# Altium PCB 电眼主板.PcbDoc (part 1 of 3)
Units mm, origin at the board's own origin, x right, y up, seen from the top; angles counter-clockwise.
Board outline 180 x 100 mm, 2 copper layers (Top Layer, Bottom Layer); 220 components, 270 nets, 826 pads, 211 vias.
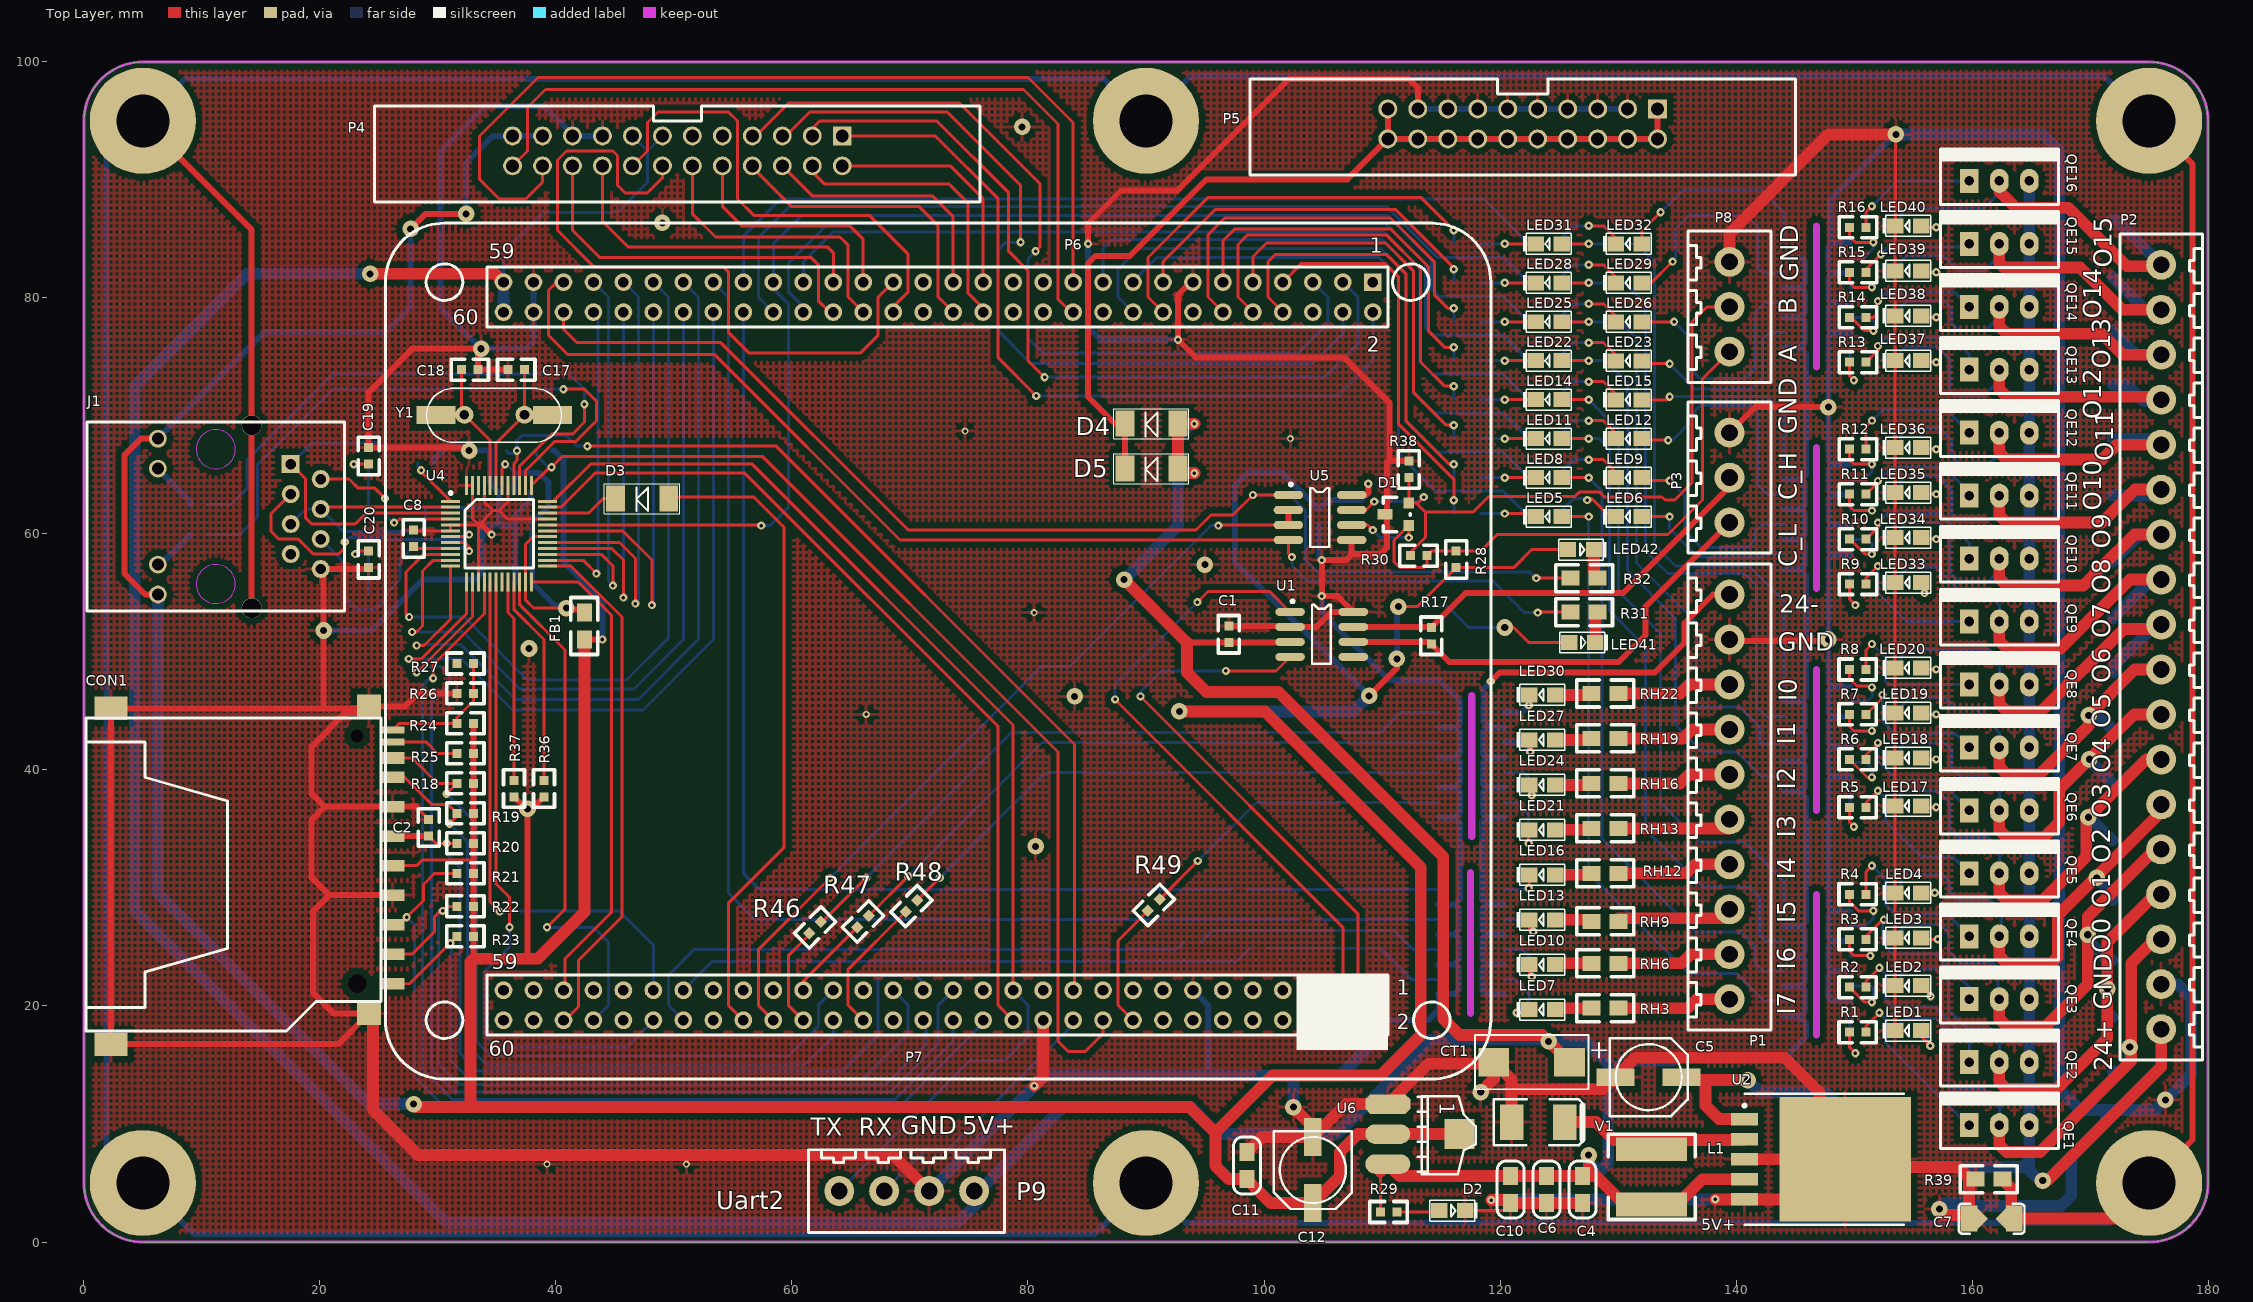
[diagram p0: Top Layer view]
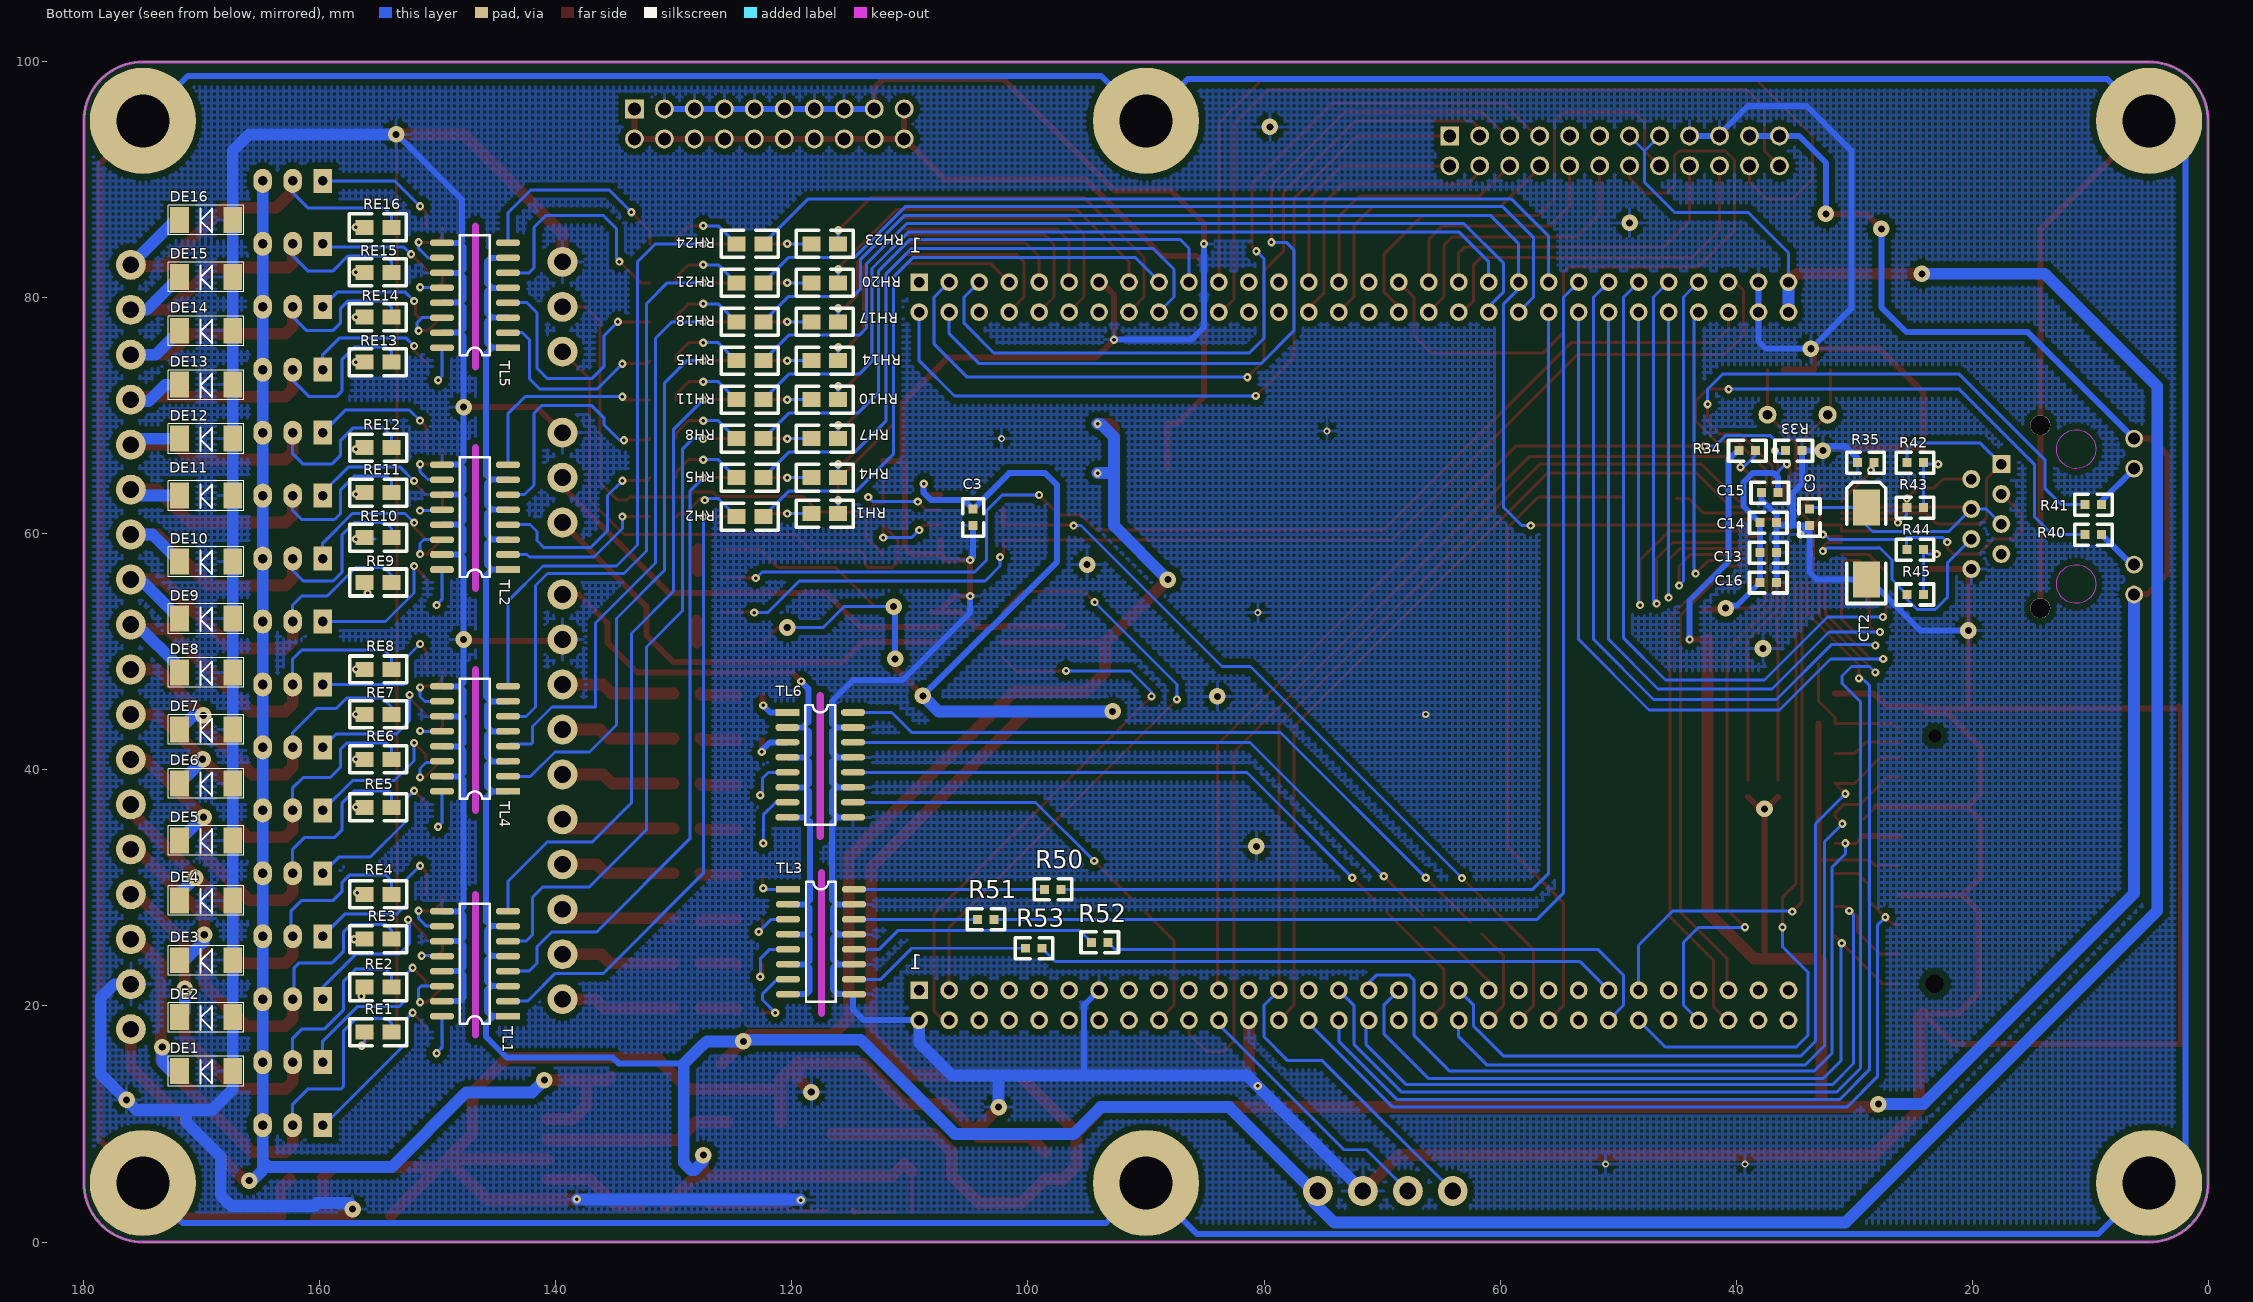
[diagram p1: Bottom Layer view, seen from below]

## Layer stack, top to bottom
Top Layer: signal copper 0.0356
Dielectric: dielectric 0.32, FR-4, Dk 4.8
Bottom Layer: signal copper 0.0356

## Board outline
0,5 ccw(c5,5) 5,0 175,0 ccw(c175,5) 180,5 180,95 ccw(c175,95) 175,100 5,100 ccw(c5,95) 0,95

## Design rules (kind name [scope] priority, off if disabled: settings)
Clearance Clearance_1 [Inpolygon] p1: gap=0.508
Clearance [All] p2: gap=0.229
HoleSize [All] p1: absolutevalues=TRUE maxlimit=5 minlimit=0.025 maxpercent=80.000 minpercent=20.000
MinimumSolderMaskSliver [All] p1: minsoldermaskwidth=0
PolygonConnect [All] p1: connectstyle=Relief reliefconductorwidth=0.254 reliefentries=4 polygonreliefangle="90 Angle"
RoutingVias [All] p1: holewidth=0.6 width=1.4 viastyle="Through Hole" minholewidth=0.3 minwidth=0.7 maxholewidth=1 maxwidth=2
SilkToSilkClearance [All] p1: silktosilkclearance=0.01
SilkscreenOverComponentPads [All] p1: minsilkscreentomaskgap=0
SolderMaskExpansion [All] p1: expansion=0.102
TestPointUsage [All] p1: valid=0 allowmultiple=FALSE
Testpoint [All] p1: side=3 testpointundercomponent=TRUE minsize=1.016 maxsize=2.54 preferedsize=1.524 minholesize=0 maxholesize=1.016 preferedholesize=0.813 testpointgrid=0.025 style=297 order=0-112345678
Width [All] p1: maxlimit=1 minlimit=0.254 preferedwidth=0.254
20 further rules are at their usual default settings.

## Components (designator, comment, footprint, x,y, rotation, side; value= is the part's Value field where it differs from the comment)
C1 "电容(贴片)" 0603 97.028,50.8 r90 top
C2 "电容(贴片)" 0603 29.21,35.814 r270 top
C3 "电容(贴片)" 0603 104.648,60.706 r90 bottom
C4 "电容(贴片)" 0805C 127,3.302 r90 top
C5 "电解电容(贴片)" CC6.56.5 132.588,13.97 r180 top
C6 "10uF" 0805C 123.952,5.588 r270 top
C7 "102/2KV" 0805CC 163.322,2.032 r180 top
C8 "电容(贴片)" 0603 27.94,58.928 r90 top
C9 "电容(贴片)" 0603 33.782,60.706 r90 bottom
C10 "电容(贴片)" 0805C 120.904,3.302 r90 top
C11 "电容(贴片)" 0805C 98.552,7.62 r270 top
C12 "电解电容(贴片)" CC6.56.5 104.14,6.096 r90 top
C13 "电容(贴片)" 0603 36.576,58.42 r0 bottom
C14 "电容(贴片)" 0603 36.576,60.96 r0 bottom
C15 "电容(贴片)" 0603 37.846,63.5 r180 bottom
C16 "电容(贴片)" 0603 36.576,55.88 r0 bottom
C17 "电容(贴片)" 0603 37.338,73.914 r180 top
C18 "电容(贴片)" 0603 32.004,73.914 r0 top
C19 "电容(贴片)" 0603 24.13,67.31 r270 top
C20 "电容(贴片)" 0603 24.13,57.15 r90 top
CON1 "SD卡座" SDCARD 26.162,24.384 r180 top
CT1 "钽电容" CT7343 122.682,15.24 r180 top
CT2 "钽电容" 6032 28.956,62.23 r90 bottom
D1 "PSM712" SOT-23 112.268,60.706 r90 top
D2 "二极管(贴片发光红色)" LED-0805 114.808,2.54 r0 top
D3 "二极管(贴片)" D1206 49.558,62.992 r180 top
D4 "二极管(贴片)" D1206 92.71,69.342 r180 top
D5 "二极管(贴片)" D1206 92.71,65.532 r180 top
DE1 "二极管(贴片)" D1206 167.386,14.478 r0 bottom
DE2 "二极管(贴片)" D1206 167.386,19.05 r0 bottom
DE3 "二极管(贴片)" D1206 167.386,23.876 r0 bottom
DE4 "二极管(贴片)" D1206 167.386,28.956 r0 bottom
DE5 "二极管(贴片)" D1206 167.386,34.036 r0 bottom
DE6 "二极管(贴片)" D1206 167.386,38.862 r0 bottom
DE7 "二极管(贴片)" D1206 167.386,43.434 r0 bottom
DE8 "二极管(贴片)" D1206 167.386,48.26 r0 bottom
DE9 "二极管(贴片)" D1206 167.386,52.832 r0 bottom
DE10 "二极管(贴片)" D1206 167.386,57.658 r0 bottom
DE11 "二极管(贴片)" D1206 167.386,63.246 r0 bottom
DE12 "二极管(贴片)" D1206 167.386,68.072 r0 bottom
DE13 "二极管(贴片)" D1206 167.386,72.644 r0 bottom
DE14 "二极管(贴片)" D1206 167.386,77.216 r0 bottom
DE15 "二极管(贴片)" D1206 167.386,81.788 r0 bottom
DE16 "二极管(贴片)" D1206 167.386,86.614 r0 bottom
FB1 "220R 2A" 0805 42.418,53.34 r270 top
J1 "RJ45" HR911105A 11.176,61.468 r90 top
L1 "电感(贴片)" 6045 132.842,7.874 r270 top
LED1 "二极管(贴片发光红色)" LED-0805 155.702,18.034 r180 top
LED2 "二极管(贴片发光红色)" LED-0805 155.702,21.844 r180 top
LED3 "二极管(贴片发光红色)" LED-0805 155.702,25.908 r180 top
LED4 "二极管(贴片发光红色)" LED-0805 155.702,29.718 r180 top
LED5 "二极管(贴片发光黄色)" LED-0805 125.247,61.595 r180 top
LED6 "二极管(贴片发光黄色)" LED-0805 132.046,61.589 r180 top
LED7 "二极管(贴片发光绿色)" LED-0805 124.714,19.812 r180 top
LED8 "二极管(贴片发光黄色)" LED-0805 125.247,64.897 r180 top
LED9 "二极管(贴片发光黄色)" LED-0805 132.046,64.891 r180 top
LED10 "二极管(贴片发光绿色)" LED-0805 124.714,23.622 r180 top
LED11 "二极管(贴片发光黄色)" LED-0805 125.247,68.199 r180 top
LED12 "二极管(贴片发光黄色)" LED-0805 132.046,68.193 r180 top
LED13 "二极管(贴片发光绿色)" LED-0805 124.714,27.432 r180 top
LED14 "二极管(贴片发光黄色)" LED-0805 125.247,71.501 r180 top
LED15 "二极管(贴片发光黄色)" LED-0805 132.046,71.495 r180 top
LED16 "二极管(贴片发光绿色)" LED-0805 124.714,31.242 r180 top
LED17 "二极管(贴片发光红色)" LED-0805 155.702,37.084 r180 top
LED18 "二极管(贴片发光红色)" LED-0805 155.702,41.148 r180 top
LED19 "二极管(贴片发光红色)" LED-0805 155.702,44.958 r180 top
LED20 "二极管(贴片发光红色)" LED-0805 155.702,48.768 r180 top
LED21 "二极管(贴片发光绿色)" LED-0805 124.714,35.052 r180 top
LED22 "二极管(贴片发光黄色)" LED-0805 125.247,74.803 r180 top
LED23 "二极管(贴片发光黄色)" LED-0805 132.046,74.797 r180 top
LED24 "二极管(贴片发光绿色)" LED-0805 124.714,38.862 r180 top
LED25 "二极管(贴片发光黄色)" LED-0805 125.247,78.105 r180 top
LED26 "二极管(贴片发光黄色)" LED-0805 132.046,78.099 r180 top
LED27 "二极管(贴片发光绿色)" LED-0805 124.714,42.672 r180 top
LED28 "二极管(贴片发光黄色)" LED-0805 125.247,81.407 r180 top
LED29 "二极管(贴片发光黄色)" LED-0805 132.046,81.401 r180 top
LED30 "二极管(贴片发光绿色)" LED-0805 124.714,46.482 r180 top
LED31 "二极管(贴片发光黄色)" LED-0805 125.247,84.709 r180 top
LED32 "二极管(贴片发光黄色)" LED-0805 132.046,84.703 r180 top
LED33 "二极管(贴片发光红色)" LED-0805 155.727,56.007 r180 top
LED34 "二极管(贴片发光红色)" LED-0805 155.727,59.817 r180 top
LED35 "二极管(贴片发光红色)" LED-0805 155.727,63.627 r180 top
LED36 "二极管(贴片发光红色)" LED-0805 155.727,67.437 r180 top
LED37 "二极管(贴片发光红色)" LED-0805 155.727,74.803 r180 top
LED38 "二极管(贴片发光红色)" LED-0805 155.727,78.613 r180 top
LED39 "二极管(贴片发光红色)" LED-0805 155.727,82.423 r180 top
LED40 "二极管(贴片发光红色)" LED-0805 155.727,86.233 r180 top
LED41 "二极管(贴片发光绿色)" LED-0805 125.832,50.673 r0 top
LED42 "二极管(贴片发光绿色)" LED-0805 125.73,58.547 r0 top
P1 "Header 10" CON10 139.446,20.574 r0 top
P2 "Header 18" CON18 176.022,82.804 r180 top
P3 "Header 3" CON3 139.446,60.96 r0 top
P4 "牛角插座" niujiaocha24P 64.262,93.726 r180 top
P5 "牛角插座" niujiaocha20p 133.35,96.012 r180 top
P6 "双排针插座（孔型）" HDR2X30 109.22,81.336 r180 top
P7 "双排针插座（孔型）" HDR2X30 109.22,21.336 r180 top
P8 "Header 3" CON3 139.446,75.438 r0 top
P9 "Header 4" con4 64.008,4.318 r0 top
QE1 "三极管(直插)" TIP127 162.306,9.906 r0 top
QE2 "三极管(直插)" TIP127 162.306,15.24 r0 top
QE3 "三极管(直插)" TIP127 162.306,20.574 r0 top
QE4 "三极管(直插)" TIP127 162.306,25.908 r0 top
QE5 "三极管(直插)" TIP127 162.306,31.242 r0 top
QE6 "三极管(直插)" TIP127 162.306,36.576 r0 top
QE7 "三极管(直插)" TIP127 162.306,41.91 r0 top
QE8 "三极管(直插)" TIP127 162.306,47.244 r0 top
QE9 "三极管(直插)" TIP127 162.306,52.578 r0 top
QE10 "三极管(直插)" TIP127 162.306,57.912 r0 top
QE11 "三极管(直插)" TIP127 162.306,63.246 r0 top
QE12 "三极管(直插)" TIP127 162.306,68.58 r0 top
QE13 "三极管(直插)" TIP127 162.306,73.914 r0 top
QE14 "三极管(直插)" TIP127 162.306,79.248 r0 top
QE15 "三极管(直插)" TIP127 162.306,84.582 r0 top
QE16 "三极管(直插)" TIP127 162.306,89.916 r0 top
R1 "电阻(贴片)" 0603 149.606,17.78 r0 top
R2 "电阻(贴片)" 0603 149.606,21.59 r0 top
R3 "电阻(贴片)" 0603 149.606,25.654 r0 top
R4 "电阻(贴片)" 0603 149.606,29.464 r0 top
R5 "电阻(贴片)" 0603 149.606,36.83 r0 top
R6 "电阻(贴片)" 0603 149.606,40.894 r0 top
R7 "电阻(贴片)" 0603 149.606,44.704 r0 top
R8 "电阻(贴片)" 0603 149.606,48.514 r0 top
R9 "电阻(贴片)" 0603 149.631,55.753 r0 top
R10 "电阻(贴片)" 0603 149.631,59.563 r0 top
R11 "电阻(贴片)" 0603 149.631,63.373 r0 top
R12 "电阻(贴片)" 0603 149.631,67.183 r0 top
R13 "电阻(贴片)" 0603 149.631,74.549 r0 top
R14 "电阻(贴片)" 0603 149.631,78.359 r0 top
R15 "电阻(贴片)" 0603 149.631,82.169 r0 top
R16 "电阻(贴片)" 0603 149.631,85.979 r0 top
R17 "电阻(贴片)" 0603 114.186,52.07 r270 top
R18 "电阻(贴片)" 0603 33.02,38.862 r180 top
R19 "电阻(贴片)" 0603 33.02,36.322 r180 top
R20 "电阻(贴片)" 0603 33.02,33.782 r180 top
R21 "电阻(贴片)" 0603 33.02,31.242 r180 top
R22 "电阻(贴片)" 0603 33.02,28.448 r180 top
R23 "电阻(贴片)" 0603 33.02,25.908 r180 top
R24 "电阻(贴片)" 0603 33.02,43.942 r180 top
R25 "电阻(贴片)" 0603 33.02,41.402 r180 top
R26 "电阻(贴片)" 0603 33.02,46.482 r180 top
R27 "电阻(贴片)" 0603 33.02,49.022 r180 top
R28 "电阻(贴片)" 0603 116.275,58.54 r270 top
R29 "" 0603 111.252,2.54 r180 top
R30 "电阻(贴片)" 0603 113.792,58.166 r180 top
R31 "电阻(贴片)" 0805 125.974,53.371 r0 top
R32 "电阻(贴片)" 0805 125.984,56.261 r0 top
R33 "电阻(贴片)" 0603 35.814,67.056 r180 bottom
R34 "电阻(贴片)" 0603 38.354,67.056 r0 bottom
R35 "电阻(贴片)" 0603 29.718,66.04 r180 bottom
R36 "电阻(贴片)" 0603 38.989,37.719 r90 top
R37 "电阻(贴片)" 0603 36.449,37.719 r90 top
R38 "电阻(贴片)" 0603 112.268,64.77 r90 top
R39 "电阻(贴片)" 0805R 160.274,5.334 r0 top
R40 "电阻(贴片)" 0603 10.414,59.944 r180 bottom
R41 "电阻(贴片)" 0603 10.414,62.484 r180 bottom
R42 "电阻(贴片)" 0603 24.13,66.04 r0 bottom
R43 "电阻(贴片)" 0603 24.13,62.23 r0 bottom
R44 "电阻(贴片)" 0603 24.13,58.674 r0 bottom
R45 "电阻(贴片)" 0603 24.13,54.864 r0 bottom
R46 "电阻(贴片)" 0603 61.468,26.162 r45 top
R47 "电阻(贴片)" 0603 65.532,26.67 r45 top
R48 "电阻(贴片)" 0603 69.624,27.968 r45 top
R49 "电阻(贴片)" 0603 90.169,28.066 r45 top
R50 "电阻(贴片)" 0603 97.195,29.885 r0 bottom
R51 "电阻(贴片)" 0603 102.87,27.345 r0 bottom
R52 "电阻(贴片)" 0603 93.218,25.4 r0 bottom
R53 "电阻(贴片)" 0603 98.806,24.892 r0 bottom
RE1 "电阻(贴片)" 0805 153.924,17.78 r0 bottom
RE2 "电阻(贴片)" 0805 153.924,21.59 r0 bottom
RE3 "电阻(贴片)" 0805 153.924,25.654 r0 bottom
RE4 "电阻(贴片)" 0805 153.924,29.464 r0 bottom
RE5 "电阻(贴片)" 0805 153.924,36.83 r0 bottom
RE6 "电阻(贴片)" 0805 153.924,40.894 r0 bottom
RE7 "电阻(贴片)" 0805 153.924,44.704 r0 bottom
RE8 "电阻(贴片)" 0805 153.924,48.514 r0 bottom
RE9 "电阻(贴片)" 0805 153.924,55.88 r0 bottom
RE10 "电阻(贴片)" 0805 153.924,59.69 r0 bottom
RE11 "电阻(贴片)" 0805 153.924,63.5 r0 bottom
RE12 "电阻(贴片)" 0805 153.924,67.31 r0 bottom
RE13 "电阻(贴片)" 0805 153.949,74.549 r0 bottom
RE14 "电阻(贴片)" 0805 153.949,78.359 r0 bottom
RE15 "电阻(贴片)" 0805 153.949,82.169 r0 bottom
RE16 "电阻(贴片)" 0805 153.949,85.979 r0 bottom
RH1 "电阻(贴片)" 0805 118.364,61.722 r180 bottom
RH2 "电阻(贴片)" 0805 124.714,61.468 r180 bottom
RH3 "电阻(贴片)" 0805 127.762,19.812 r0 top
RH4 "电阻(贴片)" 0805 118.364,64.77 r180 bottom
RH5 "电阻(贴片)" 0805 124.714,64.768 r180 bottom
RH6 "电阻(贴片)" 0805 127.762,23.622 r0 top
RH7 "电阻(贴片)" 0805 118.364,68.072 r180 bottom
RH8 "电阻(贴片)" 0805 124.714,68.072 r180 bottom
RH9 "电阻(贴片)" 0805 127.762,27.178 r0 top
RH10 "电阻(贴片)" 0805 118.364,71.374 r180 bottom
RH11 "电阻(贴片)" 0805 124.714,71.374 r180 bottom
RH12 "电阻(贴片)" 0805 127.762,31.24 r0 top
RH13 "电阻(贴片)" 0805 127.762,35.052 r0 top
RH14 "电阻(贴片)" 0805 118.364,74.676 r180 bottom
RH15 "电阻(贴片)" 0805 124.714,74.676 r180 bottom
RH16 "电阻(贴片)" 0805 127.762,38.862 r0 top
RH17 "电阻(贴片)" 0805 118.364,77.978 r180 bottom
RH18 "电阻(贴片)" 0805 124.714,77.978 r180 bottom
RH19 "电阻(贴片)" 0805 127.762,42.672 r0 top
RH20 "电阻(贴片)" 0805 118.364,81.28 r180 bottom
RH21 "电阻(贴片)" 0805 124.714,81.28 r180 bottom
RH22 "电阻(贴片)" 0805 127.762,46.482 r0 top
RH23 "电阻(贴片)" 0805 118.364,84.582 r180 bottom
RH24 "电阻(贴片)" 0805 124.714,84.582 r180 bottom
TL1 "光耦(贴片)" SOP16 146.812,23.114 r90 bottom
TL2 "光耦(贴片)" SOP16 146.812,60.96 r90 bottom
TL3 "光耦(贴片)" SOP16 117.602,25.908 r270 bottom
TL4 "光耦(贴片)" SOP16 146.812,42.164 r90 bottom
TL5 "光耦(贴片)" SOP16 146.812,79.756 r90 bottom
TL6 "光耦(贴片)" SOP16 117.661,40.894 r270 bottom
U1 "集成电路" sop8 102.248,53.34 r0 top
U2 "LM2596S-5.0" TO-263 140.716,10.414 r270 top
U4 "DM9000" mTQFP48 35.306,61.468 r0 top
U5 "集成电路" sop8 102.108,63.246 r0 top
U6 "AMS1117-3.3" AMS1117 110.49,11.684 r270 top
V1 "SK210B" 1812DT 125.476,10.16 r180 top
Y1 "晶体(贴片)" CRYSTAL_SMD 37.338,70.104 r90 top

## Footprints (in the part's own frame and the unit in brackets; to place one, negate y for a bottom-side part, rotate by r counter-clockwise, add the part's x,y. Pads: shape width x height; smd on the part's side, far side on the other; paste and mask are expansions set on the pad)
0603 [mil]
  rect 30x30 smd: 1(0,0) 2(55,0)
  silkscreen extent -35,-35 90,35
0805 [mil]
  rect 60x50 smd: 1(0,-0.06) 2(90,-0.06)
  silkscreen extent -50,-45 140,45
0805C [mil]
  rect 60x50 smd: 1(0,0) 2(90,0)
  silkscreen extent -50,-45 140,45
0805CC [mil]
  rect 56x86.61 smd mask+0: 1(-10,2) 2(141,2)
  rect 56x56 smd rot 45 mask+0: 1(13,2) 2(117,2)
  silkscreen extent -44,-48 175,52
0805R [mil]
  rect 60x50 smd: 1(0,0) 2(90,0)
  silkscreen extent -50,-45 140,45
1812DT [mm]
  rect 2x3 smd: 1(4.496,0) 2(0,0)
  silkscreen extent -1.63,-1.95 5.99,1.97
6032 [mil]
  rect 120x90 smd: 1(0,0) 2(-240,0)
  silkscreen extent -320,-65 85,65
6045 [mm]
  rect 2x6 smd: 1(0,0) 2(4.699,0)
  silkscreen extent -1.27,-3.68 5.97,3.68
AMS1117 [mil]
  oct 65x150 smd: 1(0.03,-0.06)
  oval 65x150 smd: 2(100.03,-0.06) 3(200.03,-0.06)
  rect 100x100 smd: 4(100.03,239.94)
  silkscreen extent -26,100 234,293
CC6.56.5 [mm]
  rect 3.2x1.5 smd: 1(-2.794,0) 2(2.8,0)
  silkscreen extent -3.3,-3.3 3.3,3.3
CON3 [mil]
  round 100 hole 56: 1(0,0) 2(0,150) 3(0,300)
  silkscreen extent -138,-102 138,402
con4 [mil]
  round 100 hole 56: 1(0,0) 2(150,0) 3(300,0) 4(450,0)
  silkscreen extent -102,-138 552,138
CON10 [mil]
  round 100 hole 56: 1(0,0) 2(0,150) 3(0,300) 4(0,450) 5(0,600) 6(0,750) 7(0,900) 8(0,1050) 9(0,1200) 10(0,1350)
  silkscreen extent -138,-102 138,1452
CON18 [mil]
  round 100 hole 56: 1(0,0) 2(0,150) 3(0,300) 4(0,450) 5(0,600) 6(0,750) 7(0,900) 8(0,1050) 9(0,1200) 10(0,1350) 11(0,1500) 12(0,1650) 13(0,1800) 14(0,1950) 15(0,2100) 16(0,2250) 17(0,2400) 18(0,2550)
  silkscreen extent -138,-102 138,2652
CRYSTAL_SMD [mil]
  rect 60x130 smd: 1(-0.46,-93.11) 2(-0.46,294.61)
  round 60 hole 32: 1(0,0) 2(-0.42,200.43)
  silkscreen extent -93,-123 88,327
CT7343 [mil] "CT7343"
  rect 102x95 smd: 1(-126,0) 2(126,0)
  silkscreen extent -250,-91 190,91
D1206 [mm]
  rect 1.6x2.2 smd: 1(0,0) 2(4.5,0)
  silkscreen extent -0.91,-1.24 5.46,1.27
HDR2X30 [mm] "Connector; Header; 30x2 Position"
  rect 1.5x1.5 hole 0.9: 1(0,0)
  round 1.5 hole 0.9: 2(0,2.54) 3(2.54,0) 4(2.54,2.54) 5(5.08,0) 6(5.08,2.54) 7(7.62,0) 8(7.62,2.54) 9(10.16,0) 10(10.16,2.54) 11(12.7,0) 12(12.7,2.54) 13(15.24,0) 14(15.24,2.54) 15(17.78,0) 16(17.78,2.54) 17(20.32,0) 18(20.32,2.54) 19(22.86,0) 20(22.86,2.54) 21(25.4,0) 22(25.4,2.54) 23(27.94,0) 24(27.94,2.54) 25(30.48,0) 26(30.48,2.54) 27(33.02,0) 28(33.02,2.54) 29(35.56,0) 30(35.56,2.54) 31(38.1,0) 32(38.1,2.54) 33(40.64,0) 34(40.64,2.54) 35(43.18,0) 36(43.18,2.54) 37(45.72,0) 38(45.72,2.54) 39(48.26,0) 40(48.26,2.54) 41(50.8,0) 42(50.8,2.54) 43(53.34,0) 44(53.34,2.54) 45(55.88,0) 46(55.88,2.54) 47(58.42,0) 48(58.42,2.54) 49(60.96,0) 50(60.96,2.54) 51(63.5,0) 52(63.5,2.54) 53(66.04,0) 54(66.04,2.54) 55(68.58,0) 56(68.58,2.54) 57(71.12,0) 58(71.12,2.54) 59(73.66,0) 60(73.66,2.54)
  silkscreen extent -1.27,-1.27 75.06,3.81
HR911105A [mm]
  rect 1.524x1.524 hole 0.889: 1(4.45,-6.35)
  round 1.524 hole 0.889: 2(3.18,-8.89) 3(1.91,-6.35) 4(0.64,-8.89) 5(-0.63,-6.35) 6(-1.9,-8.89) 7(-3.17,-6.35) 8(-4.44,-8.89)
  round 1.5 hole 1.02: 9(6.6,4.9) 10(4.064,4.9) 11(-4.064,4.9) 12(-6.6,4.9)
  round 1.7 hole 1.65: 13(7.75,-3.048) 14(-7.75,-3.048)
  Keep-Out Layer circle w0.051: c-5.714,0 r1.65
  Keep-Out Layer circle w0.051: c5.716,0 r1.65
  silkscreen extent -8,-10.92 8,10.92
LED-0805 [mil]
  rect 55.12x50 smd: 1(0.99,5) 2(88,5)
  silkscreen extent -31,-30 130,40
mTQFP48 [mm]
  rect 1.6x0.254 smd: 1(-4.223,1.3) 2(-4.223,0.8) 3(-4.223,0.3) 4(-4.223,-0.2) 5(-4.223,-0.7) 6(-4.223,-1.2) 7(-4.223,-1.7) 8(-4.223,-2.2) 9(-4.223,-2.7) 10(-4.223,-3.2) 11(-4.223,-3.7) 12(-4.223,-4.2) 25(3.977,-4.2) 26(3.977,-3.7) 27(3.977,-3.2) 28(3.977,-2.7) 29(3.977,-2.2) 30(3.977,-1.7) 31(3.977,-1.2) 32(3.977,-0.7) 33(3.977,-0.2) 34(3.977,0.3) 35(3.977,0.8) 36(3.977,1.3)
  rect 0.254x1.6 smd: 13(-2.873,-5.55) 14(-2.373,-5.55) 15(-1.873,-5.55) 16(-1.373,-5.55) 17(-0.873,-5.55) 18(-0.373,-5.55) 19(0.127,-5.55) 20(0.627,-5.55) 21(1.127,-5.55) 22(1.627,-5.55) 23(2.127,-5.55) 24(2.627,-5.55) 37(2.627,2.65) 38(2.127,2.65) 39(1.627,2.65) 40(1.127,2.65) 41(0.627,2.65) 42(0.127,2.65) 43(-0.373,2.65) 44(-0.873,2.65) 45(-1.373,2.65) 46(-1.873,2.65) 47(-2.373,2.65) 48(-2.873,2.65)
  silkscreen extent -4.35,-4.35 2.78,2.12
niujiaocha20p [mm]
  rect 1.6x1.6 hole 1.1: 1(0,0)
  round 1.6 hole 1.1: 2(0,2.54) 3(2.54,0) 4(2.54,2.54) 5(5.08,0) 6(5.08,2.54) 7(7.62,0) 8(7.62,2.54) 9(10.16,0) 10(10.16,2.54) 11(12.7,0) 12(12.7,2.54) 13(15.24,0) 14(15.24,2.54) 15(17.78,0) 16(17.78,2.54) 17(20.32,0) 18(20.32,2.54) 19(22.86,0) 20(22.86,2.54)
  silkscreen extent -11.68,-2.54 34.54,5.59
niujiaocha24P [mm]
  rect 1.6x1.6 hole 1.1: 1(0,0)
  round 1.6 hole 1.1: 2(0,2.54) 3(2.54,0) 4(2.54,2.54) 5(5.08,0) 6(5.08,2.54) 7(7.62,0) 8(7.62,2.54) 9(10.16,0) 10(10.16,2.54) 11(12.7,0) 12(12.7,2.54) 13(15.24,0) 14(15.24,2.54) 15(17.78,0) 16(17.78,2.54) 17(20.32,0) 18(20.32,2.54) 19(22.86,0) 20(22.86,2.54) 21(25.4,0) 22(25.4,2.54) 23(27.94,0) 24(27.94,2.54)
  silkscreen extent -11.68,-2.54 39.62,5.59
SDCARD [mm]
  rect 2x1 smd: 1(0,0) 2(0,-2.5) 3(0,-5) 4(0,-7.5) 5(0,-10) 6(0,-12.5) 7(0,-15) 8(0,-16.625) 9(0,2.5)
  rect 2x0.6 smd: 10(0,-19) 11(0,-18)
  rect 2x2 smd: 12(2,5) 13(2,-21)
  rect 2.8x2 smd: 14(23.876,-20.828) 15(23.876,7.62)
  round 1.5 hole 1.6: 16(3,2.5)
  round 1 hole 1.1: 17(3,-18.5)
  silkscreen extent 1,-20 26,6.5
sop8 [mm]
  oval 2.5x0.7 smd: 1(-0.037,0.051) 2(-0.037,-1.219) 3(-0.037,-2.489) 4(-0.037,-3.759) 5(5.32,-3.759) 6(5.32,-2.489) 7(5.32,-1.219) 8(5.32,0.051)
  silkscreen extent 0.04,-4.35 3.42,1.08
SOP16 [mil]
  rect 22x80 smd: 1(-156.57,-107.68)
  oct 22x80 smd: 2(-106.57,-107.68) 3(-56.57,-107.68) 4(-6.57,-107.68) 5(43.43,-107.68) 6(93.43,-107.68) 7(143.43,-107.68) 8(193.43,-107.68) 9(193.43,112.32) 10(143.43,112.32) 11(93.43,112.32) 12(43.43,112.32) 13(-6.57,112.32) 14(-56.57,112.32) 15(-106.57,112.32) 16(-156.57,112.32)
  silkscreen extent -182,-48 218,52
SOT-23 [mil]
  rect 36x36 smd: 1(0,0) 2(75,0)
  rect 36x50 smd: 3(38,80)
  silkscreen extent -20,-5 95,85
TIP127 [mil]
  rect 62x80 hole 32: 1(-100,0)
  oval 62x80 hole 32: 2(0,0) 3(100,0)
  silkscreen extent -197,-79 197,107
TO-263 [mil]
  rect 42x90 smd: 1(0,0) 2(66.93,0) 3(133.86,0) 4(200.79,0) 5(267.72,0)
  rect 414x440 smd: 6(133.86,336)
  silkscreen extent -85,-5 352,531

## Part data
C1 C3 C8 C9 C13 C14 C15 C16 C19 C20: library part "CAP_0.1uF X7R 0603", "0603X7R104J160NT(0.1uF)"
C2: library part "CAP_22pF COG 0603", "0603COG220J500NT(22pF)"
C4 C5 C7 C10 C11 C12: library part CAP
C6: library part Pro92D1.TMP_105_9, "片状电容"
C17: library part Cap, "Capacitor 0.1uf"
C18: library part Cap, "Capacitor 10uf"
CON1: library part SD-CARD, "SD/MMC CARD 26mm*25mm"
CT1: library part "CAP POL"
CT2: library part "CAP TAN 100uF/10V/6032", "100uF/10V/6032封装"
D1: library part Component_1
D2: library part LED
D3: library part "DIODE 1N4148/1206", "1N4148/1206"
D4 D5 DE1 DE2 DE3 DE4 DE5 DE6 DE7 DE8 DE9 DE10 DE11 DE12 DE13 DE14 DE15 DE16: library part "DIODE 1N5822/SS34", "1N5822/SS34/SMA 肖特基"
FB1: library part FERRITE, "220R,2.0A,0.05DCR"
J1: library part HR911105
L1: library part Inductor, "Inductor"
LED1 LED2 LED3 LED4 LED5 LED6 LED7 LED8 LED9 LED10 LED11 LED12 LED13 LED14 LED15 LED16 LED17 LED18 LED19 LED20 LED21 LED22 LED23 LED24 LED25 LED26 LED27 LED28 LED29 LED30 LED31 LED32 LED33 LED34 LED35 LED36 LED37 LED38 LED39 LED40 LED41 LED42: library part "LED_GREEN 0805", "LED-0805"
P1: "Header, 10-Pin"
P2: "Header, 18-Pin"
P3 P8: "Header, 3-Pin"
P4: library part "Header 12X2", "Header, 12-Pin, Dual row"
P5: library part "Header 10X2", "Header, 10-Pin, Dual row"
P6 P7: library part "Header 30X2", "Header, 30-Pin, Dual row"
P9: "Header, 4-Pin"
QE1 QE2 QE3 QE4 QE5 QE6 QE7 QE8 QE9 QE10 QE11 QE12 QE13 QE14 QE15 QE16: library part TIP127
R1 R2 R3 R4 R5 R6 R7 R8 R9 R10 R11 R12 R13 R14 R15 R16 R18 R19 R20 R21 R22 R23 R24 R25 R33 R34 R35 R36 R37: library part "RES_10K 5% 0603", "RS-03K-103±5%(10KΩ)"
R17 R28 R30 R31 R32 R38 R46 R47 R48 R49 R50 R51 R52 R53: library part "RES_1K  5% 0603", "RS-03K-102±5%(1KΩ)"
R26 R27: library part "RES_0Ω 5% 0603", "RS-03K-000±5%(0Ω)"
R29: library part RESISTOR_Dup1
R39: library part Res2, "Resistor"
R40 R41 R42 R43 R44 R45: library part "RES_10K 5% 0603", "RS-03K-49.9±5%(49.9Ω)"
RE1 RE2 RE3 RE4 RE5 RE6 RE7 RE8 RE9 RE10 RE11 RE12 RE13 RE14 RE15 RE16: library part "RES_5.1K 5% 0805", "RS-05K-512±5%(5.1KΩ 5%)"
RH1 RH2 RH4 RH5 RH7 RH8 RH10 RH11 RH14 RH15 RH17 RH18 RH20 RH21 RH23 RH24: library part "RES_200Ω5% 0805", "RS-05K-201±5%(200Ω)"
RH3 RH6 RH9 RH12 RH13 RH16 RH19 RH22: library part "RES_200Ω5% 0805", "RS-05K-4.7K±5%(4.7KΩ)"
TL1 TL2 TL3 TL4 TL5 TL6: library part "隔离光耦 TLP281-4/SOP16", "TLP281-4/SOP16"
U1: library part TJA1050
U2: library part LM2575T5.0(5), "SIMPLE SWITCHER 1A STEP DOWN VOLTAGE REGULATOR"
U4: library part DM9000A
U5: library part SP485
U6: library part AMS1117
V1: library part DIODE1, "1N5824"
Y1: library part "CRYSTAL 12M HC-49SMD", "HC-49SMD/25.000MHz"

## Free pads (board coordinates)
  round 9 hole 4.5: 0(5,5) 0(5,95) 0(90,5) 0(90,95) 0(175,5) 0(175,95)

## Via types
v1: diameter 0.7, hole 0.3, Top Layer to Bottom Layer, 166 vias
v2: diameter 1.4, hole 0.6, Top Layer to Bottom Layer, 39 vias
v3: diameter 0.6, hole 0.3, Top Layer to Bottom Layer, 6 vias

## Nets (pads, with @x,y where several pads share a name; then routed paths per layer and width w, separated by ;. In a path a pad name is that pad's centre, name@x,y a point inside that pad or via, vN(x,y) a via of type N, cw(c..) or ccw(c..) an arc to the next point about the centre after c; other vN are vias at no path point)
485_A: D1.1 P8.1 R28.1 R30.1 U5.6 | length 52.6
  Top Layer w0.254: U5.6@107.428,60.757 108.788,60.757 v1(109.22,60.325) ; v1(112.268,59.69) D1.1@112.268,60.706 111.02,59.458 111.02,57.636 111.506,57.15 113.538,57.15 113.792,57.404 R30.1@113.792,58.166 114.166,58.54 R28.1@116.275,58.54 118.357,58.54 119.761,59.944 134.239,59.944 137.16,62.865 137.16,73.152 P8.1@139.446,75.438
  Bottom Layer w0.254: v1(109.22,60.325) 109.855,59.69 v1(112.268,59.69)
485_B: D1.2 P8.2 R30.2 R38.1 U5.7 | length 57
  Top Layer w0.254: U5.7@107.428,62.027 108.636,62.027 v1(109.347,62.738) ; R38.1@112.268,64.77 D1.2@112.268,62.611 112.903,62.611 ; R30.2@112.395,58.166 112.395,58.42 113.665,59.69 113.665,61.849 ; v1(113.538,63.119) 113.03,62.611 112.903,62.611 ; P8.2@139.446,79.248 137.541,79.248 136.271,77.978 136.271,64.343 134.793,62.865 133.985,62.865 133.731,63.119 128.849,63.119 128.397,63.571 126.746,63.571 126.34,63.164 119.044,63.164 117.729,61.849 113.665,61.849 ; 112.903,62.611 113.665,61.849
  Bottom Layer w0.254: v1(109.347,62.738) 113.157,62.738 v1(113.538,63.119)
A0: P4.1 P6.2 | length 67.3
  Top Layer w0.254: P4.1@64.262,93.726 72.136,93.726 77.47,88.392 77.47,74.93 v1(80.709,71.691)
  Bottom Layer w0.254: v1(80.709,71.691) 106.236,71.691 109.22,74.676 P6.2@109.22,78.796
A1: P4.3 P6.3 | length 70.4
  Top Layer w0.254: P4.3@61.722,93.726 61.722,94.361 62.357,94.996 72.263,94.996 78.359,88.9 78.359,83.947 80.01,82.296 80.01,74.676 v1(81.407,73.279)
  Bottom Layer w0.254: v1(81.407,73.279) 105.156,73.279 107.95,76.073 107.95,80.066 P6.3@106.68,81.336
A2: P4.5 P6.4 | length 70.7
  Top Layer w0.254: P4.5@59.182,93.726 59.468,93.726 61.5,95.758 73.152,95.758 79.375,89.535 v1(79.375,84.709)
  Bottom Layer w0.254: v1(79.375,84.709) 78.105,84.709 77.47,84.074 77.47,77.216 80.264,74.422 104.14,74.422 106.68,76.962 P6.4@106.68,78.796
CAN_RX: P7.4 U1.4 | length 50.2
  Top Layer w0.254: v1(89.535,46.228) 107.95,27.813 107.95,19.558 107.188,18.796 P7.4@106.68,18.796 ; v1(96.774,48.387) 101.017,48.387 U1.4@102.211,49.581
  Bottom Layer w0.254: v1(89.535,46.228) 89.535,46.609 91.313,48.387 v1(96.774,48.387)
CAN_TX: P7.3 U1.1 | length 52.7
  Top Layer w0.254: v1(87.376,45.974) 106.68,26.67 P7.3@106.68,21.336 ; v1(94.361,54.229) 95.25,55.118 100.484,55.118 U1.1@102.211,53.391
  Bottom Layer w0.254: v1(87.376,45.974) 87.376,47.244 v1(94.361,54.229)
CH0: P4.2 P6.27 | length 20.2
  Top Layer w0.254: P4.2@64.262,91.186 73.406,91.186 76.2,88.392 P6.27@76.2,81.336
CH1: P4.4 P6.28 | length 24.1
  Top Layer w0.254: P4.4@61.722,90.678 62.738,89.662 73.279,89.662 74.93,88.011 74.93,80.391 76.2,79.121 P6.28@76.2,78.796
CH2: P4.6 P6.29 | length 21.8
  Top Layer w0.254: P4.6@59.182,91.186 61.722,88.646 71.882,88.646 73.66,86.868 P6.29@73.66,81.336
CH3: P4.8 P6.30 | length 25.8
  Top Layer w0.254: P4.8@56.642,91.186 56.642,91.059 59.944,87.757 70.739,87.757 72.39,86.106 72.39,80.066 P6.30@73.66,78.796
CH4: P4.10 P6.35 | length 20.2
  Top Layer w0.254: P4.10@54.102,91.186 54.102,87.757 55.753,86.106 64.897,86.106 66.04,84.963 P6.35@66.04,81.336
CH5: P4.12 P6.36 | length 23.9
  Top Layer w0.254: P4.12@51.562,90.527 51.562,87.122 53.521,85.163 64.062,85.163 64.77,84.455 64.77,80.066 P6.36@66.04,78.796
CH6: P4.14 P6.33 | length 59.8
  Top Layer w0.254: P4.14@49.022,91.186 49.022,90.17 47.752,88.9 45.847,88.9 45.212,89.535 45.212,92.075 44.831,92.456 40.894,92.456 40.132,91.694 40.132,85.725 43.251,82.606 54.229,82.606 54.61,82.225 54.61,77.089 56.388,75.311 65.786,75.311 67.31,76.835 67.31,80.066 P6.33@68.58,81.336
CH7: P4.16 P6.34 | length 41
  Top Layer w0.254: P4.16@46.482,91.186 47.752,92.456 47.752,94.854 48.656,95.758 54.61,95.758 55.388,94.98 55.388,88.376 56.769,86.995 66.548,86.995 69.85,83.693 69.85,80.518 68.58,79.248 P6.34@68.58,78.796
CH8: P4.18 P6.37 | length 27.7
  Top Layer w0.254: P4.18@43.942,91.059 43.942,86.487 46.101,84.328 62.992,84.328 63.5,83.82 P6.37@63.5,81.336
CH9: P4.20 P6.38 | length 32.2
  Top Layer w0.254: P4.20@41.402,91.186 41.402,85.725 43.688,83.439 61.595,83.439 62.23,82.804 62.23,79.756 63.19,78.796 P6.38@63.5,78.796
CH10: P4.22 P6.21 | length 79.1
  Top Layer w0.254: P4.22@38.862,91.186 38.862,89.789 37.465,88.392 35.179,88.392 33.528,90.043 33.528,93.726 38.481,98.679 80.01,98.679 83.82,94.869 P6.21@83.82,81.336
CH11: P4.24 P6.22 | length 68.9
  Top Layer w0.254: P4.24@36.322,91.186 37.592,92.456 37.592,96.139 39.116,97.663 79.629,97.663 82.55,94.742 82.55,79.883 83.637,78.796 P6.22@83.82,78.796
CH12: P6.23
CH13: P6.24
DAC_OUT1: P6.31
DAC_OUT2: P6.32
DM9000_INT: D3.1 P7.44 | length 55.1
  Top Layer w0.254: D3.1@49.558,63.119 56.769,63.119 59.309,60.579 59.309,33.401 54.61,28.702 54.61,20.066 P7.44@55.88,18.796
DM9000_RST: P7.21 R33.1 U4.40 | length 84.2
  Top Layer w0.254: U4.40@36.433,64.118 36.433,65.944 36.703,66.214 v1(36.703,67.056) ; v1(42.672,67.437) 58.674,67.437 83.947,42.164 83.947,21.463 P7.21@83.82,21.336
  Bottom Layer w0.254: R33.1@35.814,67.056 36.068,66.802 36.449,66.802 v1(36.703,67.056) 36.703,67.945 37.084,68.326 40.894,68.326 41.783,67.437 v1(42.672,67.437)
EN: P4.7 P6.5 | length 72.9
  Top Layer w0.254: P4.7@56.642,93.726 56.928,93.726 59.722,96.52 74.168,96.52 81.026,89.662 81.026,84.328 v1(80.645,83.947)
  Bottom Layer w0.254: v1(80.645,83.947) 80.01,83.312 80.01,76.581 81.28,75.311 102.87,75.311 105.41,77.851 105.41,80.066 P6.5@104.14,81.336
EXT_IN_CH0: P1.8 RH22.2 | length 9.7
  Top Layer w1: RH22.2@130.05,46.482 135.255,46.482 136.017,47.244 P1.8@139.446,47.244
EXT_IN_CH1: P1.7 RH19.2 | length 9.7
  Top Layer w1: RH19.2@130.05,42.672 135.509,42.672 136.271,43.434 P1.7@139.446,43.434
EXT_IN_CH2: P1.6 RH16.2 | length 9.7
  Top Layer w1: RH16.2@130.05,38.862 135.255,38.862 136.017,39.624 P1.6@139.446,39.624
EXT_IN_CH3: P1.5 RH13.2 | length 9.4
  Top Layer w1: RH13.2@130.048,35.05 139.444,35.05 P1.5@139.446,35.052
EXT_IN_CH4: P1.4 RH12.2 | length 9.7
  Top Layer w1: RH12.2@130.05,31.242 135.763,31.242 136.525,32.004 P1.4@139.446,32.004
EXT_IN_CH5: P1.3 RH9.2 | length 9.4
  Top Layer w1: RH9.2@130.05,27.432 P1.3@139.446,27.432
EXT_IN_CH6: P1.2 RH6.2 | length 9.7
  Top Layer w1: RH6.2@130.05,23.622 135.382,23.622 136.144,24.384 P1.2@139.446,24.384
EXT_IN_CH7: P1.1 RH3.2 | length 9.7
  Top Layer w1: RH3.2@130.048,19.81 135.89,19.81 136.654,20.574 P1.1@139.446,20.574 ; P1.1@139.444,19.81 P1.1@139.446,19.812
EXT_OUT_CH0: DE1.2 P2.16 QE1.2 RE1.1 | length 47.8
  Top Layer w1: QE1.2@162.306,9.906 162.306,8.255 162.941,7.62 165.735,7.62 173.482,15.367 173.482,23.622 175.514,25.654 P2.16@176.022,25.654
  Bottom Layer w0.254: RE1.1@153.924,17.78 153.924,18.542 154.305,18.923 156.969,18.923 157.988,17.904 157.988,13.208 158.242,12.954 161.036,12.954 162.306,11.684 QE1.2@162.306,9.906
  Bottom Layer w1: DE1.2@171.886,14.478 172.593,14.478 173.355,15.24 v2(173.355,16.51)
EXT_OUT_CH1: DE2.2 P2.15 QE2.2 RE2.1 | length 45.3
  Top Layer w1: QE2.2@162.306,15.24 162.306,13.589 162.941,12.954 167.132,12.954 171.45,17.272 171.45,19.05 171.45,25.4 175.514,29.464 P2.15@176.022,29.464
  Bottom Layer w0.254: RE2.1@153.924,21.59 153.924,22.606 154.432,23.114 156.972,23.114 157.988,22.098 157.988,19.685 159.639,18.034 161.544,18.034 162.306,17.272 QE2.2@162.306,15.24
  Bottom Layer w1: v2(171.45,21.463) 171.45,19.486 DE2.2@171.886,19.05
EXT_OUT_CH2: DE3.2 P2.14 QE3.2 RE3.1 | length 42.9
  Top Layer w1: QE3.2@162.306,20.574 162.306,18.923 162.941,18.288 166.243,18.288 169.798,21.843 169.798,27.558 175.514,33.274 P2.14@176.022,33.274
  Bottom Layer w0.254: RE3.1@153.924,25.654 153.924,26.416 154.432,26.924 157.353,26.924 157.988,26.289 157.988,24.638 159.004,23.622 161.798,23.622 162.179,23.241 162.179,20.701 QE3.2@162.306,20.574
  Bottom Layer w1: v2(169.799,26.035) v2(169.799,26.035) 169.798,25.527 171.449,23.876 DE3.2@171.886,23.876
EXT_OUT_CH3: DE4.2 P2.13 QE4.2 RE4.1 | length 39.9
  Top Layer w1: QE4.2@162.306,25.908 162.306,24.257 162.941,23.622 166.719,23.622 167.259,24.162 167.259,27.686 176.022,36.449 P2.13@176.022,37.084
  Bottom Layer w0.254: RE4.1@153.924,29.464 153.924,30.607 154.432,31.115 157.48,31.115 158.115,30.48 158.115,29.718 158.877,28.956 161.544,28.956 162.433,28.067 162.433,26.035 QE4.2@162.306,25.908
  Bottom Layer w1: v2(170.561,30.861) 171.886,29.536 DE4.2@171.886,28.956
EXT_OUT_CH4: DE5.2 P2.12 QE5.2 RE5.1 | length 40.5
  Top Layer w1: QE5.2@162.306,31.242 162.306,29.591 162.941,28.956 165.989,28.956 169.672,32.639 169.672,35.814 174.752,40.894 P2.12@176.022,40.894
  Bottom Layer w0.254: RE5.1@153.924,36.83 153.924,37.973 154.178,38.227 157.099,38.227 158.115,37.211 158.115,34.925 158.75,34.29 161.29,34.29 162.306,33.274 QE5.2@162.306,31.242
  Bottom Layer w1: v2(169.853,35.995) 169.853,36.014 169.799,36.068 169.854,36.068 DE5.2@171.886,34.036
EXT_OUT_CH5: DE6.2 P2.11 QE6.2 RE6.1 | length 38.4
  Top Layer w1: QE6.2@162.306,36.576 162.306,34.925 162.941,34.29 166.116,34.29 167.386,35.56 167.386,38.354 172.148,43.116 173.736,44.704 P2.11@176.022,44.704
  Bottom Layer w0.254: RE6.1@153.924,40.894 153.924,41.91 154.305,42.291 157.734,42.291 158.242,41.783 158.242,40.259 159.131,39.37 161.417,39.37 162.306,38.481 QE6.2@162.306,36.576
  Bottom Layer w1: v2(169.936,40.904) 169.936,40.812 DE6.2@171.886,38.862
EXT_OUT_CH6: DE7.2 P2.10 QE7.2 RE7.1 | length 34.1
  Top Layer w1: QE7.2@162.306,41.91 162.306,40.259 162.941,39.624 165.735,39.624 169.907,43.796 v2@169.907,44.639 ; v2(169.884,44.616) v2@169.907,44.639 ; P2.10@176.022,48.514 173.782,48.514 v2@169.907,44.639
  Bottom Layer w0.254: RE7.1@153.924,44.704 153.924,45.339 154.686,46.101 157.734,46.101 158.623,45.212 160.274,45.212 162.306,43.18 QE7.2@162.306,41.91
  Bottom Layer w1: v2(169.884,44.616) 170.704,44.616 DE7.2@171.886,43.434
EXT_OUT_CH7: DE8.2 P2.9 QE8.2 RE8.1 | length 36.9
  Top Layer w1: QE8.2@162.306,47.244 162.306,45.593 162.941,44.958 165.862,44.958 172.847,51.943 175.641,51.943 P2.9@176.022,52.324
  Bottom Layer w0.254: RE8.1@153.924,48.514 153.924,49.53 154.559,50.165 161.544,50.165 162.306,49.403 QE8.2@162.306,47.244
  Bottom Layer w1: DE8.2@171.886,48.26 171.886,48.696 175.514,52.324 P2.9@176.022,52.324
EXT_OUT_CH8: DE9.2 P2.8 QE9.2 RE9.1 | length 35.5
  Top Layer w1: QE9.2@162.306,52.578 162.306,50.927 162.941,50.292 167.513,50.292 173.355,56.134 P2.8@176.022,56.134
  Bottom Layer w0.254: RE9.1@153.924,55.88 153.924,56.515 154.559,57.15 156.972,57.15 159.385,54.737 161.544,54.737 162.306,53.975 QE9.2@162.306,52.578
  Bottom Layer w1: DE9.2@171.886,52.832 175.188,56.134 P2.8@176.022,56.134
EXT_OUT_CH9: DE10.2 P2.7 QE10.2 RE10.1 | length 37.2
  Top Layer w1: QE10.2@162.306,57.912 162.306,56.261 162.941,55.626 169.418,55.626 170.998,57.206 173.736,59.944 P2.7@176.022,59.944
  Bottom Layer w0.254: RE10.1@153.924,59.69 153.924,60.452 154.432,60.96 157.099,60.96 158.115,59.944 158.115,56.769 158.877,56.007 161.417,56.007 162.306,56.896 QE10.2@162.306,57.912
  Bottom Layer w1: DE10.2@171.886,57.658 174.172,59.944 P2.7@176.022,59.944
EXT_OUT_CH10: DE11.2 P2.6 QE11.2 RE11.1 | length 35
  Top Layer w1: QE11.2@162.306,63.246 162.306,61.595 162.941,60.96 170.998,60.96 173.792,63.754 P2.6@176.022,63.754
  Bottom Layer w0.254: RE11.1@153.924,63.5 153.924,64.516 154.305,64.897 157.099,64.897 158.242,63.754 158.242,61.722 158.75,61.214 161.544,61.214 162.306,61.976 QE11.2@162.306,63.246
  Bottom Layer w1: DE11.2@171.886,63.246 175.514,63.246 P2.6@176.022,63.754
EXT_OUT_CH11: DE12.2 P2.5 QE12.2 RE12.1 | length 34.3
  Top Layer w1: QE12.2@162.306,68.58 162.306,66.929 162.941,66.294 170.998,66.294 172.268,67.564 P2.5@176.022,67.564
  Bottom Layer w0.254: RE12.1@153.924,67.31 153.924,68.326 154.559,68.961 157.226,68.961 158.242,67.945 158.242,66.675 159.004,65.913 161.417,65.913 162.306,66.802 QE12.2@162.306,68.58
  Bottom Layer w1: DE12.2@171.886,68.072 175.514,68.072 P2.5@176.022,67.564
EXT_OUT_CH12: DE13.2 P2.4 QE13.2 RE13.1 | length 34.7
  Top Layer w1: QE13.2@162.306,73.914 162.306,72.263 162.941,71.628 175.768,71.628 P2.4@176.022,71.374
  Bottom Layer w0.254: RE13.1@153.949,74.549 153.949,75.463 154.305,75.819 157.099,75.819 158.115,74.803 158.115,72.136 158.623,71.628 160.909,71.628 162.306,73.025 QE13.2@162.306,73.914
  Bottom Layer w1: DE13.2@171.886,72.644 173.101,72.644 174.498,71.247 175.895,71.247 P2.4@176.022,71.374
EXT_OUT_CH13: DE14.2 P2.3 QE14.2 RE14.1 | length 33.9
  Top Layer w1: QE14.2@162.306,79.248 162.306,77.597 162.941,76.962 170.998,76.962 172.776,75.184 P2.3@176.022,75.184
  Bottom Layer w0.254: RE14.1@153.949,78.359 153.949,79.223 154.482,79.756 157.607,79.756 158.242,79.121 158.242,77.883 158.877,77.248 161.163,77.248 162.306,78.391 QE14.2@162.306,79.248
  Bottom Layer w1: DE14.2@171.886,77.216 173.918,75.184 P2.3@176.022,75.184
EXT_OUT_CH14: DE15.2 P2.2 QE15.2 RE15.1 | length 33.8
  Top Layer w1: QE15.2@162.306,84.582 162.306,82.963 162.687,82.582 169.132,82.582 172.72,78.994 P2.2@176.022,78.994
  Bottom Layer w0.254: RE15.1@153.949,82.169 153.949,83.083 154.409,83.543 157.63,83.543 158.877,82.296 161.036,82.296 162.306,83.566 QE15.2@162.306,84.582
  Bottom Layer w1: DE15.2@171.886,81.788 174.68,78.994 P2.2@176.022,78.994
EXT_OUT_CH15: DE16.2 P2.1 QE16.2 RE16.1 | length 34.2
  Top Layer w1: QE16.2@162.306,89.916 162.306,89.027 163.703,87.63 168.148,87.63 173.101,82.677 175.895,82.677 P2.1@176.022,82.804
  Bottom Layer w0.254: RE16.1@153.949,85.979 153.949,87.02 154.559,87.63 161.036,87.63 162.306,88.9 QE16.2@162.306,89.916
  Bottom Layer w1: DE16.2@171.886,86.614 172.212,86.614 P2.1@176.022,82.804
FSMC_A0: P6.7 RH1.2 | length 32.9
  Top Layer w0.254: P6.7@101.6,81.336 103.195,82.931 110.236,82.931 111.379,81.788 111.379,69.341 116.078,64.642 v1(116.078,62.863)
  Bottom Layer w0.254: RH1.2@116.078,61.72 v1(116.078,62.863)
FSMC_A1: P6.8 RH4.2 | length 36.6
  Top Layer w0.254: P6.8@101.6,78.796 100.33,80.066 100.33,83.058 100.965,83.693 110.363,83.693 112.014,82.042 112.014,69.596 115.699,65.911 v1(116.078,65.911)
  Bottom Layer w0.254: RH4.2@116.078,64.768 v1(116.078,65.911)
FSMC_A2: P6.9 RH7.2 | length 33.2
  Top Layer w0.254: P6.9@99.06,81.336 99.06,83.512 100.203,84.655 110.29,84.655 112.649,82.296 112.649,72.009 115.445,69.213 v1(116.078,69.213)
  Bottom Layer w0.254: RH7.2@116.078,68.07 v1(116.078,69.213)
FSMC_A3: P6.10 RH10.2 | length 36
  Top Layer w0.254: P6.10@99.06,78.796 97.79,80.066 97.79,84.528 98.606,85.344 110.363,85.344 113.259,82.448 113.259,74.574 115.318,72.515 v1(116.078,72.515)
  Bottom Layer w0.254: RH10.2@116.078,71.372 v1(116.078,72.515)
FSMC_A4: P6.11 RH14.2 | length 32
  Top Layer w0.254: P6.11@96.52,81.336 96.52,84.836 97.536,85.852 110.725,85.852 113.919,82.658 113.919,77.216 115.318,75.817 v1(116.078,75.817)
  Bottom Layer w0.254: RH14.2@116.078,74.674 v1(116.078,75.817)
FSMC_A5: P6.12 RH17.2 | length 34.4
  Top Layer w0.254: P6.12@96.52,78.796 95.25,80.066 95.25,85.344 96.666,86.76 110.725,86.76 114.427,83.058 114.427,80.264 115.572,79.119 v1(116.078,79.119)
  Bottom Layer w0.254: RH17.2@116.078,77.976 v1(116.078,79.119)
FSMC_A6: P6.40 RH15.2 | length 76.8
  Bottom Layer w0.254: P6.40@60.96,78.796 60.96,79.248 59.69,80.518 59.69,82.931 63.065,86.306 110.276,86.306 113.69,82.891 113.69,77.445 114.3,76.835 120.267,76.835 RH15.2@122.428,74.674
FSMC_A7: P6.41 RH18.2 U4.32 | length 114.1
  Top Layer w0.254: U4.32@39.283,60.768 57.342,60.768 v1(57.404,60.706)
  Bottom Layer w0.254: v1(57.404,60.706) 58.166,60.706 59.69,62.23 59.69,79.502 58.42,80.772 58.42,84.582 60.833,86.995 110.443,86.995 114.173,83.265 114.173,80.772 114.808,80.137 120.267,80.137 RH18.2@122.428,77.976
FSMC_A8: P6.42 RH21.2 | length 75.9
  Bottom Layer w0.254: P6.42@58.42,78.796 57.15,80.066 57.15,85.09 59.817,87.757 110.363,87.757 114.681,83.439 120.267,83.439 RH21.2@122.428,81.278
FSMC_A9: P6.43 RH24.2 | length 73.3
  Bottom Layer w0.254: P6.43@55.88,81.336 55.88,85.217 59.055,88.392 118.616,88.392 RH24.2@122.428,84.58
FSMC_A10: P6.44 R50.1 | length 89.6
  Bottom Layer w0.254: P6.44@55.88,78.796 55.88,31.242 57.237,29.885 R50.1@97.195,29.885 R50.1@97.282,29.972
FSMC_A11: P6.45 R51.1 | length 101.5
  Bottom Layer w0.254: P6.45@53.34,81.336 54.61,80.066 54.61,29.591 56.856,27.345 R51.1@102.87,27.345
FSMC_A12: P7.48 R52.1 | length 49.2
  Bottom Layer w0.254: P7.48@50.8,18.796 49.53,20.066 49.53,22.606 51.729,24.805 92.623,24.805 R52.1@93.218,25.4
FSMC_A13: P7.47 R53.1 | length 49.5
  Bottom Layer w0.254: P7.47@50.8,21.336 53.213,23.749 97.663,23.749 R53.1@98.806,24.892
FSMC_A14: P7.46
FSMC_A15: P7.45
FSMC_A16: P7.53
FSMC_A17: P7.52
FSMC_A18: P7.51
FSMC_A23: P6.1
FSMC_A24: P7.16
FSMC_A25: P7.15
FSMC_CD: P6.18 RH5.2 | length 55
  Bottom Layer w0.254: P6.18@88.9,78.796 87.63,80.066 87.63,82.423 89.408,84.201 109.855,84.201 112.014,82.042 112.014,69.596 114.681,66.929 120.266,66.929 RH5.2@122.428,64.767
FSMC_CLK: P7.27
FSMC_D0: P7.50 U4.18 | length 55.5
  Top Layer w0.254: U4.18@34.933,55.918 34.933,51.57 34.925,51.562 34.925,30.353 35.052,30.226 36.068,29.21 v1(36.068,26.67)
  Bottom Layer w0.254: v1(36.068,26.67) 36.068,25.019 33.909,22.86 33.909,17.526 34.925,16.51 45.974,16.51 P7.50@48.26,18.796
FSMC_D1: P7.49 U4.17 | length 46.3
  Top Layer w0.254: U4.17@34.433,55.918 34.433,28.813 v1(35.244,28.002)
  Bottom Layer w0.254: v1(35.244,28.002) 35.309,28.067 45.339,28.067 48.26,25.146 P7.49@48.26,21.336
FSMC_D2: P7.30 U4.16 | length 93.6
  Top Layer w0.254: v1(29.591,47.752) 29.591,48.895 33.909,53.213 33.933,53.213 U4.16@33.933,55.918
  Bottom Layer w0.254: v1(29.591,47.752) 29.464,47.879 29.421,47.879 28.714,47.172 28.714,14.593 31.242,12.065 68.707,12.065 73.66,17.018 P7.30@73.66,18.796
FSMC_D3: P7.29 U4.14 | length 97.4
  Top Layer w0.254: v1(28.194,48.26) 32.933,52.999 U4.14@32.933,55.918
  Bottom Layer w0.254: v1(28.194,48.26) 28.702,48.768 30.226,48.768 31.031,47.963 31.031,47.346 29.464,45.779 29.464,14.732 31.496,12.7 68.326,12.7 72.39,16.764 72.39,20.066 P7.29@73.66,21.336
FSMC_D4: P6.46 U4.13 | length 67
  Top Layer w0.254: v1(27.536,49.41) 28.582,49.41 32.433,53.261 U4.13@32.433,55.918
  Bottom Layer w0.254: v1(27.536,49.41) 31.997,49.41 36.322,45.085 47.371,45.085 53.34,51.054 P6.46@53.34,78.796
FSMC_D5: P6.47 U4.12 | length 67.1
  Top Layer w0.254: v1(28.194,50.546) 28.829,50.546 31.083,52.8 U4.12@31.083,57.268
  Bottom Layer w0.254: v1(28.194,50.546) 28.298,50.65 31.9,50.65 36.576,45.974 46.99,45.974 52.07,51.054 52.07,80.066 P6.47@50.8,81.336
FSMC_D6: P6.48 U4.11 | length 63
  Top Layer w0.254: v1(27.813,51.689) 28.194,51.689 28.702,52.197 28.702,56.862 29.608,57.768 ; 29.574,57.768 29.608,57.768 ; U4.11@31.083,57.768 29.608,57.768
  Bottom Layer w0.254: v1(27.813,51.689) 32.131,51.689 36.957,46.863 46.609,46.863 50.8,51.054 P6.48@50.8,78.796
FSMC_D7: P6.49 U4.10 | length 64.7
  Top Layer w0.254: v1(27.559,52.959) 27.305,53.213 27.305,56.769 28.804,58.268 U4.10@31.083,58.268
  Bottom Layer w0.254: v1(27.559,52.959) 32.258,52.959 37.592,47.625 45.974,47.625 49.558,51.209 49.558,80.038 P6.49@48.26,81.336
FSMC_D8: P6.50 U4.31 | length 38.6
  Top Layer w0.254: U4.31@39.283,60.268 45.65,60.268 48.133,57.785 v1(48.133,53.975)
  Bottom Layer w0.254: v1(48.133,53.975) 48.26,54.102 P6.50@48.26,78.796
FSMC_D9: P6.51 U4.29 | length 39.7
  Top Layer w0.254: U4.29@39.283,59.268 45.38,59.268 46.736,57.912 v1(46.736,54.102)
  Bottom Layer w0.254: P6.51@45.72,81.336 46.99,80.066 46.99,54.356 v1(46.736,54.102)
FSMC_D10: P6.52 U4.28 | length 34.2
  Top Layer w0.254: U4.28@39.283,58.768 44.737,58.768 45.72,57.785 v1(45.72,54.61)
  Bottom Layer w0.254: v1(45.72,54.61) P6.52@45.72,78.796
FSMC_D11: P6.53 U4.27 | length 34
  Top Layer w0.254: U4.27@39.3,58.251 U4.27@39.283,58.268 43.84,58.268 44.831,57.277 v1(44.831,55.626)
  Bottom Layer w0.254: P6.53@43.18,81.336 44.45,80.066 44.45,56.007 v1(44.831,55.626)
FSMC_D12: P6.54 U4.26 | length 27
  Top Layer w0.254: U4.26@39.283,57.768 42.308,57.768 v1(43.434,56.642)
  Bottom Layer w0.254: P6.54@43.18,78.796 43.561,78.415 43.561,56.769 v1(43.434,56.642)
FSMC_D13: P7.56 U4.25 | length 44.4
  Top Layer w0.254: U4.25@39.283,57.268 41.284,57.268 45.593,52.959 45.593,27.559 41.91,23.876 41.91,19.939 40.767,18.796 P7.56@40.64,18.796
FSMC_D14: P7.55 U4.24 | length 41.4
  Top Layer w0.254: U4.24@37.933,55.918 41.889,55.918 44.704,53.103 44.704,27.94 40.767,24.003 40.767,21.463 P7.55@40.64,21.336
FSMC_D15: P7.54 U4.22 | length 44.3
  Top Layer w0.254: U4.22@36.933,55.918 36.933,53.999 40.767,50.165 40.767,28.194 v1(39.243,26.67)
  Bottom Layer w0.254: v1(39.243,26.67) 43.18,26.67 44.45,25.4 44.45,20.066 P7.54@43.18,18.796
FSMC_INT3: P7.43
FSMC_INTR: P6.19 RH8.2 | length 52.3
  Bottom Layer w0.254: P6.19@86.36,81.336 86.36,84.201 87.122,84.963 109.982,84.963 112.649,82.296 112.649,72.009 114.427,70.231 120.267,70.231 RH8.2@122.428,68.07
FSMC_NBL0: P7.6
FSMC_NBL1: P7.5
FSMC_NE2: P7.20 R34.1 U4.37 | length 88.5
  Top Layer w0.254: U4.37@37.933,64.118 39.474,65.659 v1(39.624,65.659) 40.513,66.548 57.531,66.548 82.55,41.529 82.55,17.018 83.439,16.129 84.836,16.129 86.36,17.653 P7.20@86.36,18.796
  Bottom Layer w0.254: R34.1@38.354,67.056 38.354,66.675 39.37,65.659 v1(39.624,65.659)
FSMC_NE3: P7.19
FSMC_NE4: P7.17
FSMC_NIORD: P6.15 RH20.2 | length 31.5
  Top Layer w0.254: P6.15@91.44,81.336 91.44,83.058 95.885,87.503 111.125,87.503 116.078,82.55 v1(116.078,82.421)
  Bottom Layer w0.254: RH20.2@116.078,81.278 v1(116.078,82.421)
FSMC_NIOS16: P6.39 RH11.2 | length 74.7
  Bottom Layer w0.254: P6.39@60.96,81.336 60.96,83.058 63.5,85.598 110.109,85.598 113.208,82.499 113.208,74.625 114.3,73.533 120.267,73.533 RH11.2@122.428,71.372
FSMC_NIOWR: P6.17 RH2.2 | length 52.3
  Bottom Layer w0.254: P6.17@88.9,81.336 88.9,81.407 90.932,83.439 109.728,83.439 111.379,81.788 111.379,66.802 114.554,63.627 120.267,63.627 RH2.2@122.428,61.466
FSMC_NOE: P7.26 U4.35 | length 73.7
  Top Layer w0.254: U4.35@39.283,62.268 40.424,62.268 43.307,65.151 56.007,65.151 77.47,43.688 77.47,20.066 P7.26@78.74,18.796
FSMC_NREG: P6.16 RH23.2 | length 35.5
  Top Layer w0.254: P6.16@91.44,78.796 90.17,80.066 90.17,83.415 95.274,88.519 113.282,88.519 v1(116.078,85.723)
  Bottom Layer w0.254: RH23.2@116.078,84.58 v1(116.078,85.723)
FSMC_NWAIT: P7.22 P9.2 | length 22.2
  Bottom Layer w0.254: P9.2@67.818,4.318 71.318,7.818 73.223,7.818 83.82,18.415 P7.22@83.82,18.796
FSMC_NWE: P7.25 P9.1 U4.36 | length 98.3
  Top Layer w0.254: U4.36@39.283,62.768 39.781,62.768 42.926,65.913 56.642,65.913 78.74,43.815 P7.25@78.74,21.336
  Bottom Layer w0.254: P9.1@64.008,4.318 75.057,15.367 77.978,15.367 80.01,17.399 80.01,20.066 P7.25@78.74,21.336